# EAGLE board Power_Demo_R2(routed) (EAGLE 5.10)
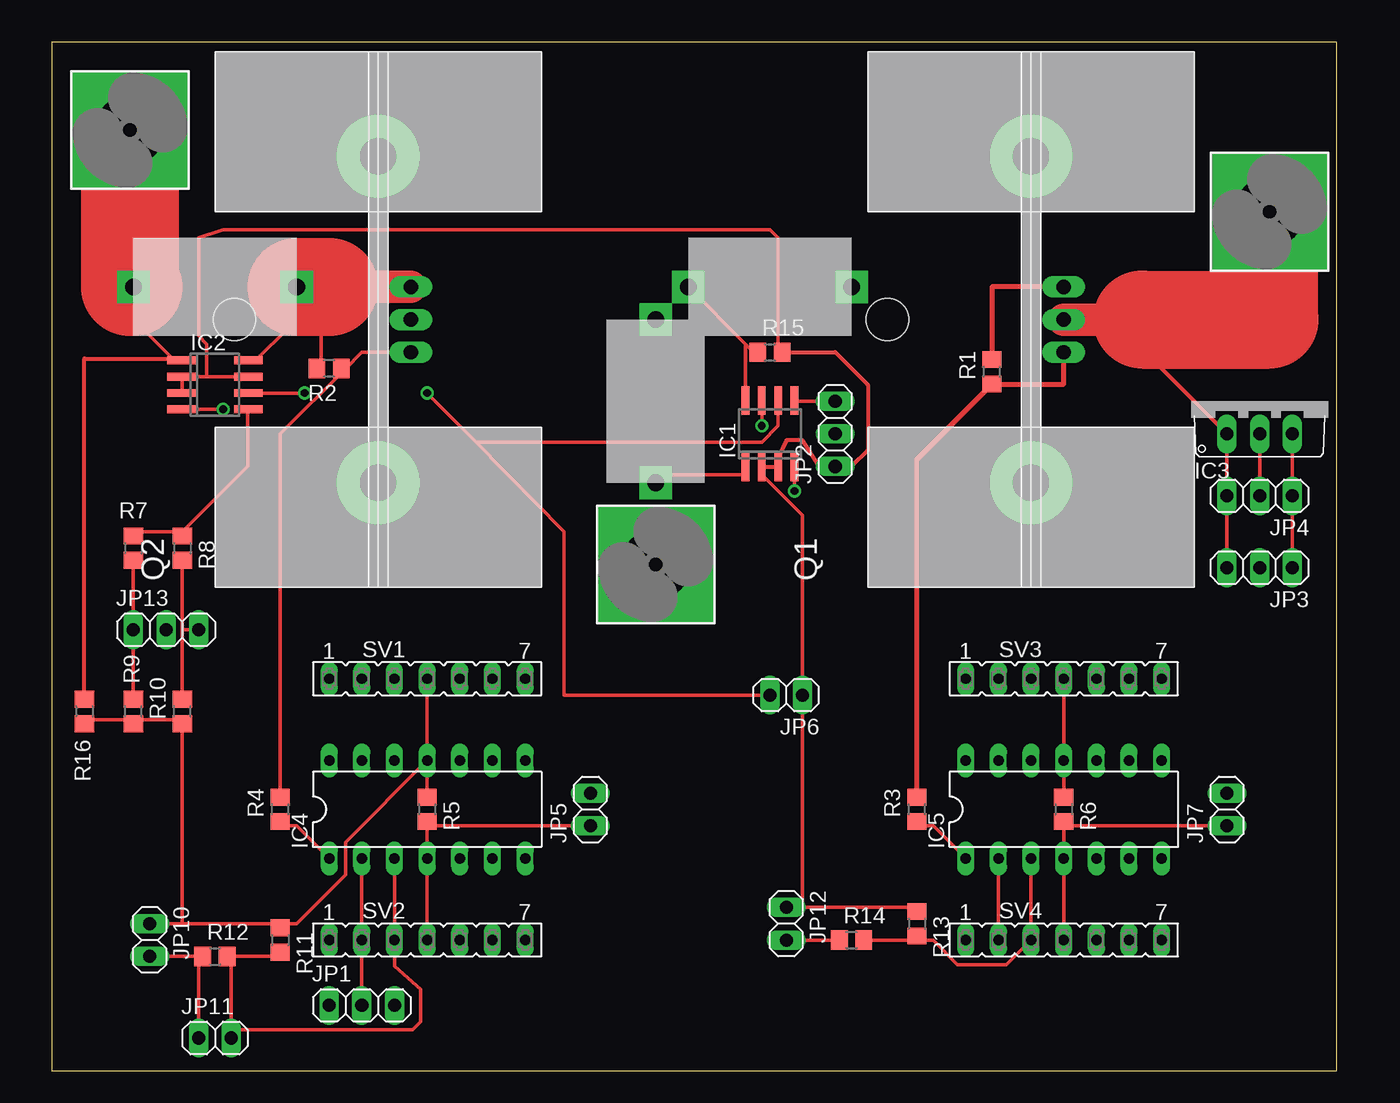
[diagram p0: board, top side]
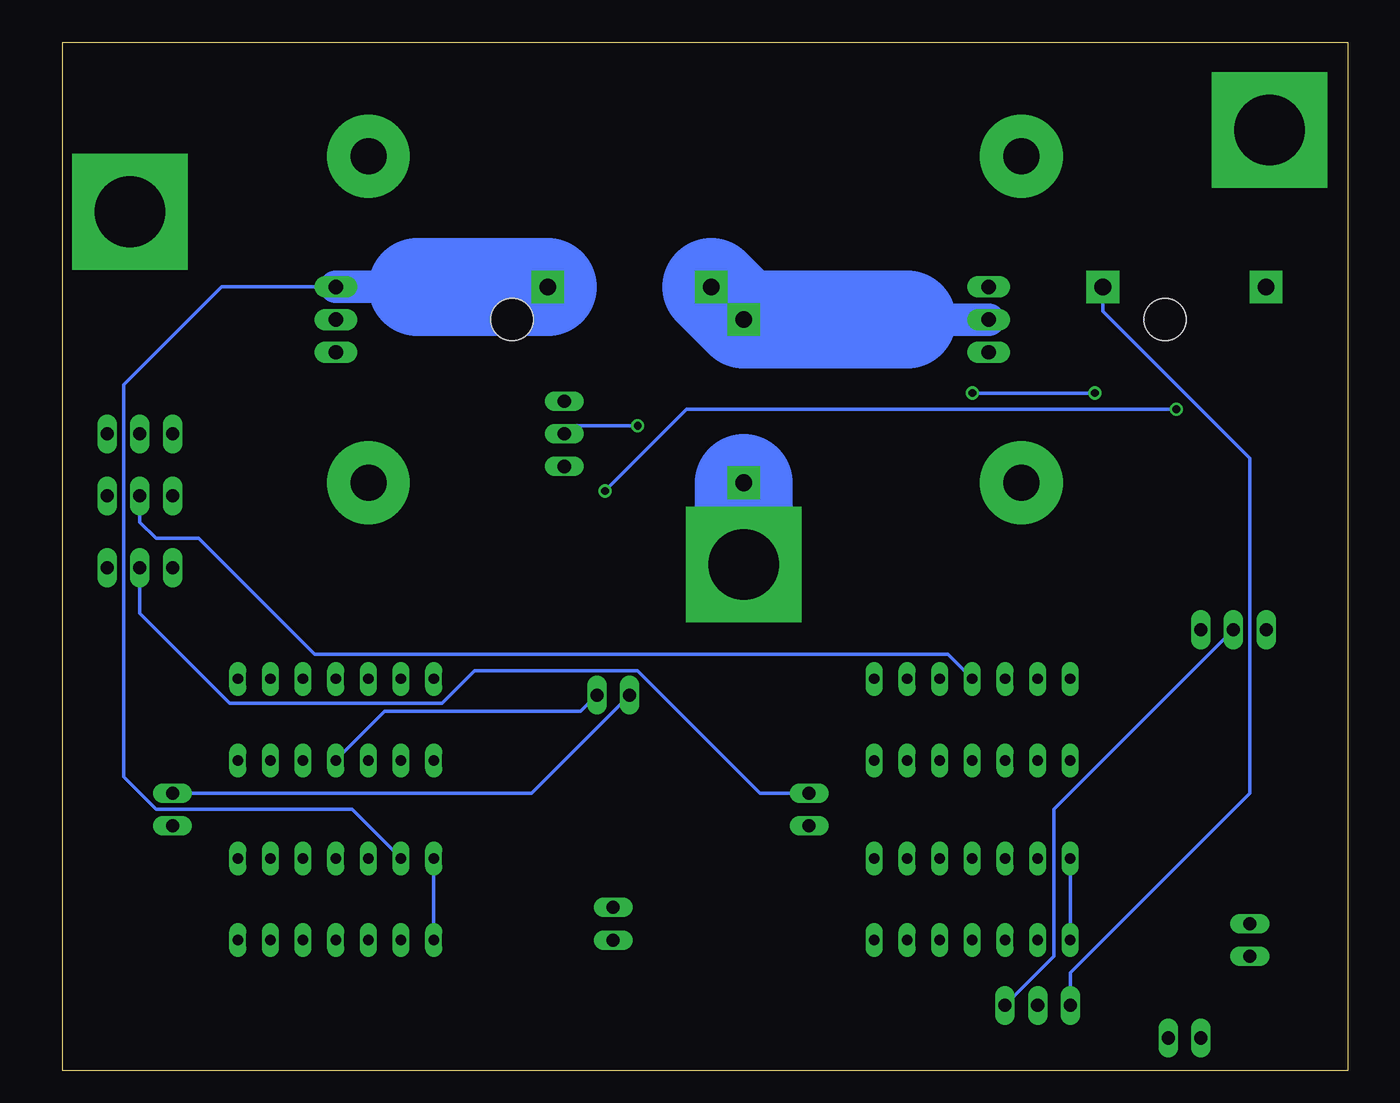
[diagram p1: board, bottom side, seen from below]

Size 100 x 80 mm. Coordinates in mm from the lower left corner, seen from the top.
Outline: 0,0 100,0 100,80 0,80 0,0
Copper layers (1*16): Top 0.035mm / dielectric 1.5mm / Bottom 0.035mm
Design rules "default": minimum track width 10mil, minimum drill 24mil, track to track 8mil, track to pad 8mil, pad to pad 8mil, via to via 8mil, smd to smd 8mil, copper to edge 40mil, drill to drill 8mil, minimum pad ring 10mil, minimum via ring 8mil, stop-mask expansion 4mil, vias tented up to drill 0mil, thermal gap 10mil

## Footprints (pad centres in the part's own frame; a part is rotated, then mirrored left to right if it is on the bottom)
5,5-PAD-SQUARE = drill 5.5 pad 9 square: B5,5 0,0
SO08 = smd 0.6 x 2.2: 1 -1.905,-2.6; 2 -0.635,-2.6; 3 0.635,-2.6; 4 1.905,-2.6; 5 1.905,2.6; 6 0.635,2.6; 7 -0.635,2.6; 8 -1.905,2.6
TO220V = drill 1.016 long: 1 -2.54,-2.54; 2 0,-2.54; 3 2.54,-2.54
DIL14 = drill 0.813 long: 1 -7.62,-3.81; 2 -5.08,-3.81; 3 -2.54,-3.81; 4 0,-3.81; 5 2.54,-3.81; 6 5.08,-3.81; 7 7.62,-3.81; 8 7.62,3.81; 9 5.08,3.81; 10 2.54,3.81; 11 0,3.81; 12 -2.54,3.81; 13 -5.08,3.81; 14 -7.62,3.81
1X03 = drill 1.016 long: 1 -2.54,0; 2 0,0; 3 2.54,0
1X02 = drill 1.016 long: 1 -1.27,0; 2 1.27,0
TO220-W/657-20ABP = drill 1.118 long: 1 -2.54,-2.54; 2 0,-2.54; 3 2.54,-2.54 | drill 2.8 pad 6.452 round: P$1 -12.7,0; P$2 12.7,0 | hole 3.302: 0,11.176
R0805 = smd 1.3 x 1.5: 1 -0.95,0; 2 0.95,0
FE07 = drill 0.813 long: 1 -7.62,0; 2 -5.08,0; 3 -2.54,0; 4 0,0; 5 2.54,0; 6 5.08,0; 7 7.62,0
630HR050E = drill 1.3 pad 2.54 square: P$1 -6.35,0; P$2 6.35,0

## Placement (x,y rotation side)
BATTERY-  MOUNT-PAD-SQUARE5.5  [5,5-PAD-SQUARE]  46.99,39.37 0 top
BATTERY/CHARGER+  MOUNT-PAD-SQUARE5.5  [5,5-PAD-SQUARE]  94.74,66.8 0 top
CHARGER-  MOUNT-PAD-SQUARE5.5  [5,5-PAD-SQUARE]  6.1,73.15 0 top
IC1  AD8210D  [SO08]  55.88,49.53 0 top
IC2  AD8210D  [SO08]  12.7,53.34 270 top
IC3  7805TV  [TO220V]  93.98,52.07 0 top
IC4  MC33079P  [DIL14]  29.21,20.32 0 top
IC5  MC33079P  [DIL14]  78.74,20.32 0 top
JP1  [1X03]  24.13,5.08 0 top
JP2  [1X03]  60.96,49.53 90 top
JP3  [1X03]  93.98,39.12 180 top
JP4  [1X03]  93.98,44.7 180 top
JP5  [1X02]  41.91,20.32 90 top
JP6  [1X02]  57.15,29.21 180 top
JP7  [1X02]  91.44,20.32 90 top
JP10  [1X02]  7.62,10.16 270 top
JP11  [1X02]  12.7,2.54 0 top
JP12  [1X02]  57.15,11.43 270 top
JP13  [1X03]  8.89,34.29 0 top
Q1  RFP12N10L  [TO220-W/657-20ABP]  76.2,58.42 90 top
Q2  RFP12N10L  [TO220-W/657-20ABP]  25.4,58.42 90 top
R1  100k  [R0805]  73.15,54.36 90 top
R2  100k  [R0805]  21.59,54.61 180 top
R3  50  [R0805]  67.31,20.32 90 top
R4  50  [R0805]  17.78,20.32 90 top
R5  1k  [R0805]  29.21,20.32 270 top
R6  1k  [R0805]  78.74,20.32 270 top
R7  750  [R0805]  6.35,40.64 270 top
R8  82k  [R0805]  10.16,40.64 270 top
R9  3000  [R0805]  6.35,27.94 90 top
R10  4.3k  [R0805]  10.16,27.94 90 top
R11  1k  [R0805]  17.78,10.16 270 top
R12  15k  [R0805]  12.7,8.89 0 top
R13  1k  [R0805]  67.31,11.43 270 top
R14  15k  [R0805]  62.23,10.16 0 top
R15  0  [R0805]  55.88,55.88 0 top
R16  0  [R0805]  2.54,27.94 270 top
SV1  [FE07]  29.21,30.48 0 top
SV2  [FE07]  29.21,10.16 0 top
SV3  [FE07]  78.74,30.48 0 top
SV4  [FE07]  78.74,10.16 0 top
U$1  630HR050E  [630HR050E]  55.88,60.96 0 top
U$2  630HR050E  [630HR050E]  46.99,52.07 90 top
U$3  630HR050E  [630HR050E]  12.7,60.96 0 top

## Library data of the parts
BATTERY- BATTERY/CHARGER+ CHARGER- = holes
IC1 IC2 Q1 Q2 U$1-U$3 = NEWPARTS
IC3-IC5 = linear
JP1-JP7 JP10-JP13 = pinhead
R1-R16 = rcl
SV1-SV4 = con-lsta

## Nets
+5V: IC1.6 IC2.6 JP6.2 JP7.2
GND: IC1.2 IC1.3 IC2.2 IC2.3 IC2.7 IC5.11 JP2.1 JP6.1 JP12.1 R6.1 R13.1 R15.2 SV3.4
LOAD: BATTERY/CHARGER+.B5,5 IC3.1 JP3.3 JP4.3 Q1.2
N$1: IC1.8 Q2.2 R15.1 U$1.P$1 U$2.P$2
N$2: IC3.3 JP3.1 JP4.1
N$3: IC2.8 JP1.1 Q2.3 R2.2 U$3.P$2
N$4: IC1.5 JP2.3
N$5: BATTERY-.B5,5 IC1.1 U$2.P$1
N$6: Q2.1 R2.1 R4.2
N$8: Q1.1 R1.1 R3.2
N$9: IC1.7 JP2.2
N$10: JP1.3 JP13.2
N$11: CHARGER-.B5,5 IC2.1 R16.1 U$3.P$1
N$12: IC4.4 JP5.1 R5.2 SV2.4
N$13: IC4.1 R4.1 SV2.1
N$14: IC4.2 JP1.2 SV2.2
N$15: JP13.1 R7.2 R9.2
N$17: JP10.2 JP11.1 R12.1
N$18: JP3.2 JP5.2
N$19: IC4.3 JP11.2 R11.2 R12.2 SV2.3
N$20: IC5.1 R3.1 SV4.1
N$21: IC5.2 Q1.3 R1.2 SV4.2 U$1.P$2
N$22: IC2.5 R7.1 R8.1
N$23: JP13.3 R8.2 R10.2
N$24: IC5.4 JP7.1 R6.2 SV4.4
N$27: JP12.2 R14.1
N$28: IC5.3 R13.2 R14.2 SV4.3
N$29: IC3.2 IC4.11 JP4.2 JP10.1 R5.1 R9.1 R10.1 R11.1 R16.2 SV1.4
NC: IC1.4 IC2.4

## Tracks (layer width: path | path; a pad name or v marks a point on that pad's centre or on a via)
+5V  (via drill 0.61)
  Top 0.254: 33.02,48.9 39.88,41.91 39.88,29.21 JP6.2 | v29.21,52.7 33.02,48.9 | IC2.6 v19.68,52.7 | 33.02,48.9 55.24,48.9 56.52,50.16 IC1.6
  Bottom 0.254: v19.68,52.7 v29.21,52.7 | JP7.2 63.5,21.59 JP6.2
GND
  Top 0.254: R6.1 IC5.11 SV3.4 | 58.42,12.7 67.31,12.7 R13.1 | 58.42,12.7 JP6.1 58.42,43.18 55.24,46.35 IC1.2 | 58.42,12.7 JP12.1 | 10.16,53.98 10.16,52.7 IC2.3 | 10.16,53.98 12.06,53.98 | 12.06,53.98 IC2.7 | 10.16,53.98 IC2.2 | 12.06,53.98 12.06,56.52 11.43,57.15 11.43,64.77 13.34,65.41 55.88,65.41 56.52,64.77 56.52,55.88 R15.2
  Top 0.305: IC1.2 IC1.3 56.52,47.62 57.15,49.02 58.42,49.02 59.69,46.99 JP2.1 62.23,46.99 63.5,48.26 63.5,53.34 60.96,55.88 R15.2
  Bottom 0.254: IC5.11 74.93,27.94 59.69,27.94 JP6.1
LOAD
  Top 0.254: JP3.3 JP4.3 IC3.1
  Top 0.305: Q1.2 82.55,58.42 IC3.1
  Top 2.54: Q1.2 84.84,58.42
  Top 7.62: BATTERY/CHARGER+.B5,5 94.74,58.42 84.84,58.42
N$1
  Top 0.254: U$1.P$1 53.98,56.52 | 53.98,56.52 54.61,55.88 R15.1 | 53.98,56.52 IC1.8
  Bottom 2.54: Q2.2 34.29,58.42
  Bottom 7.62: U$1.P$1 U$2.P$2 34.29,58.42
N$2
  Top 0.254: JP3.1 JP4.1 IC3.3
N$3
  Top 0.254: R2.2 20.95,54.61 20.95,60.96 | IC2.8 15.88,55.24 18.41,57.78 U$3.P$2
  Top 2.54: 21.59,60.96 Q2.3
  Top 7.62: U$3.P$2 20.95,60.96 21.59,60.96
  Bottom 0.254: JP1.1 21.59,7.62 7.62,21.59 7.62,47.62 19.05,59.05 U$3.P$2
N$4
  Top 0.254: JP2.3 57.78,52.07 IC1.5
N$5
  Top 0.254: U$2.P$1 47.62,46.35 53.98,46.35 IC1.1
  Bottom 7.62: BATTERY-.B5,5 U$2.P$1
N$6
  Top 0.254: 22.86,54.61 17.78,49.53 R4.2 | Q2.1 24.13,55.88 22.86,54.61 | 22.86,54.61 R2.1
N$8
  Top 0.406: Q1.1 78.74,53.41 R1.1 67.31,47.56 R3.2
N$9  (via drill 0.61)
  Top 0.254: v55.24,50.16 IC1.7
  Bottom 0.254: v55.24,50.16 60.33,50.16 JP2.2
N$10
  Bottom 0.254: JP1.3 22.86,8.89 22.86,20.32 JP13.2
N$11
  Top 0.254: IC2.1 9.53,55.24 9.4,55.37 6.99,57.78 U$3.P$1
  Top 0.305: R16.1 2.54,55.37 9.4,55.37
  Top 7.62: CHARGER-.B5,5 6.1,60.96 U$3.P$1
N$12
  Top 0.254: 29.21,19.05 IC4.4 SV2.4 | 29.21,19.05 JP5.1 | 29.21,19.05 R5.2
N$13
  Top 0.254: IC4.1 19.05,19.05 17.78,19.05 R4.1
  Bottom 0.254: SV2.1 IC4.1
N$14
  Top 0.254: JP1.2 SV2.2 IC4.2
N$15
  Top 0.254: R9.2 JP13.1 R7.2
N$17
  Top 0.254: 11.43,8.89 JP10.2 | JP11.1 11.43,8.89 | 11.43,8.89 R12.1
N$18
  Bottom 0.254: JP5.2 45.72,21.59 55.24,31.11 67.94,31.11 70.48,28.57 87,28.57 93.98,35.56 JP3.2
N$19
  Top 0.254: IC4.3 SV2.3 26.67,8.13 28.7,6.35 28.7,3.81 28.07,3.17 13.97,3.17 | 13.97,8.89 17.78,8.89 R11.2 | 13.97,3.17 13.97,8.89 | 13.97,8.89 R12.2 | JP11.2 13.97,3.17
N$20
  Top 0.254: IC5.1 68.58,19.05 67.31,19.05 R3.1
  Bottom 0.254: SV4.1 IC5.1
N$21
  Top 0.254: SV4.2 IC5.2
  Top 0.406: R1.2 73.15,60.96 Q1.3
  Bottom 0.254: IC5.2 77.47,20.32 92.71,20.32 95.25,22.86 95.25,53.34 87.63,60.96 Q1.3
  Bottom 2.54: Q1.3 72.39,60.96
  Bottom 7.62: 72.39,60.96 U$1.P$2
N$22
  Top 0.254: 10.16,41.91 6.35,41.91 R7.1 | 10.16,41.91 15.24,46.99 15.24,51.44 IC2.5 | 10.16,41.91 R8.1
N$23
  Top 0.254: R10.2 10.16,34.29 | 10.16,34.29 R8.2 | 10.16,34.29 JP13.3
N$24
  Top 0.254: 78.74,19.05 IC5.4 SV4.4 | 78.74,19.05 JP7.1 | 78.74,19.05 R6.2
N$27
  Top 0.254: JP12.2 R14.1
N$28
  Top 0.254: R14.2 67.31,10.16 | IC5.3 SV4.3 74.3,8.26 70.48,8.26 68.58,10.16 67.31,10.16 | 67.31,10.16 R13.2
N$29
  Top 0.254: 6.35,27.3 2.54,27.3 R16.2 | 6.35,27.3 10.16,27.3 R10.1 10.16,11.43 | 6.35,27.3 R9.1 | JP10.1 10.16,11.43 | 10.16,11.43 17.78,11.43 | JP4.2 IC3.2 | IC4.11 R5.1 | IC4.11 SV1.4 | 17.78,11.43 19.05,11.43 22.86,15.24 22.86,17.78 IC4.11 | 17.78,11.43 R11.1
  Bottom 0.254: JP4.2 93.98,42.67 92.71,41.4 89.41,41.4 80.39,32.38 31.11,32.38 SV1.4
NC  (via drill 0.61)
  Top 0.254: IC2.4 v13.34,51.44 | v57.78,45.09 IC1.4
  Bottom 0.254: v13.34,51.44 51.44,51.44 v57.78,45.09